# Altium PCB przed poligonami.PcbDoc
Units mm, origin at the board's own origin, x right, y up, seen from the top; angles counter-clockwise.
Board outline 50 x 35 mm, 4 copper layers (Top Layer, Internal1, Internal2, Bottom Layer), stack 1.615 mm thick; 67 components, 59 nets, 267 pads, 77 vias.
Unrouted connection lines stored in the file: 101.
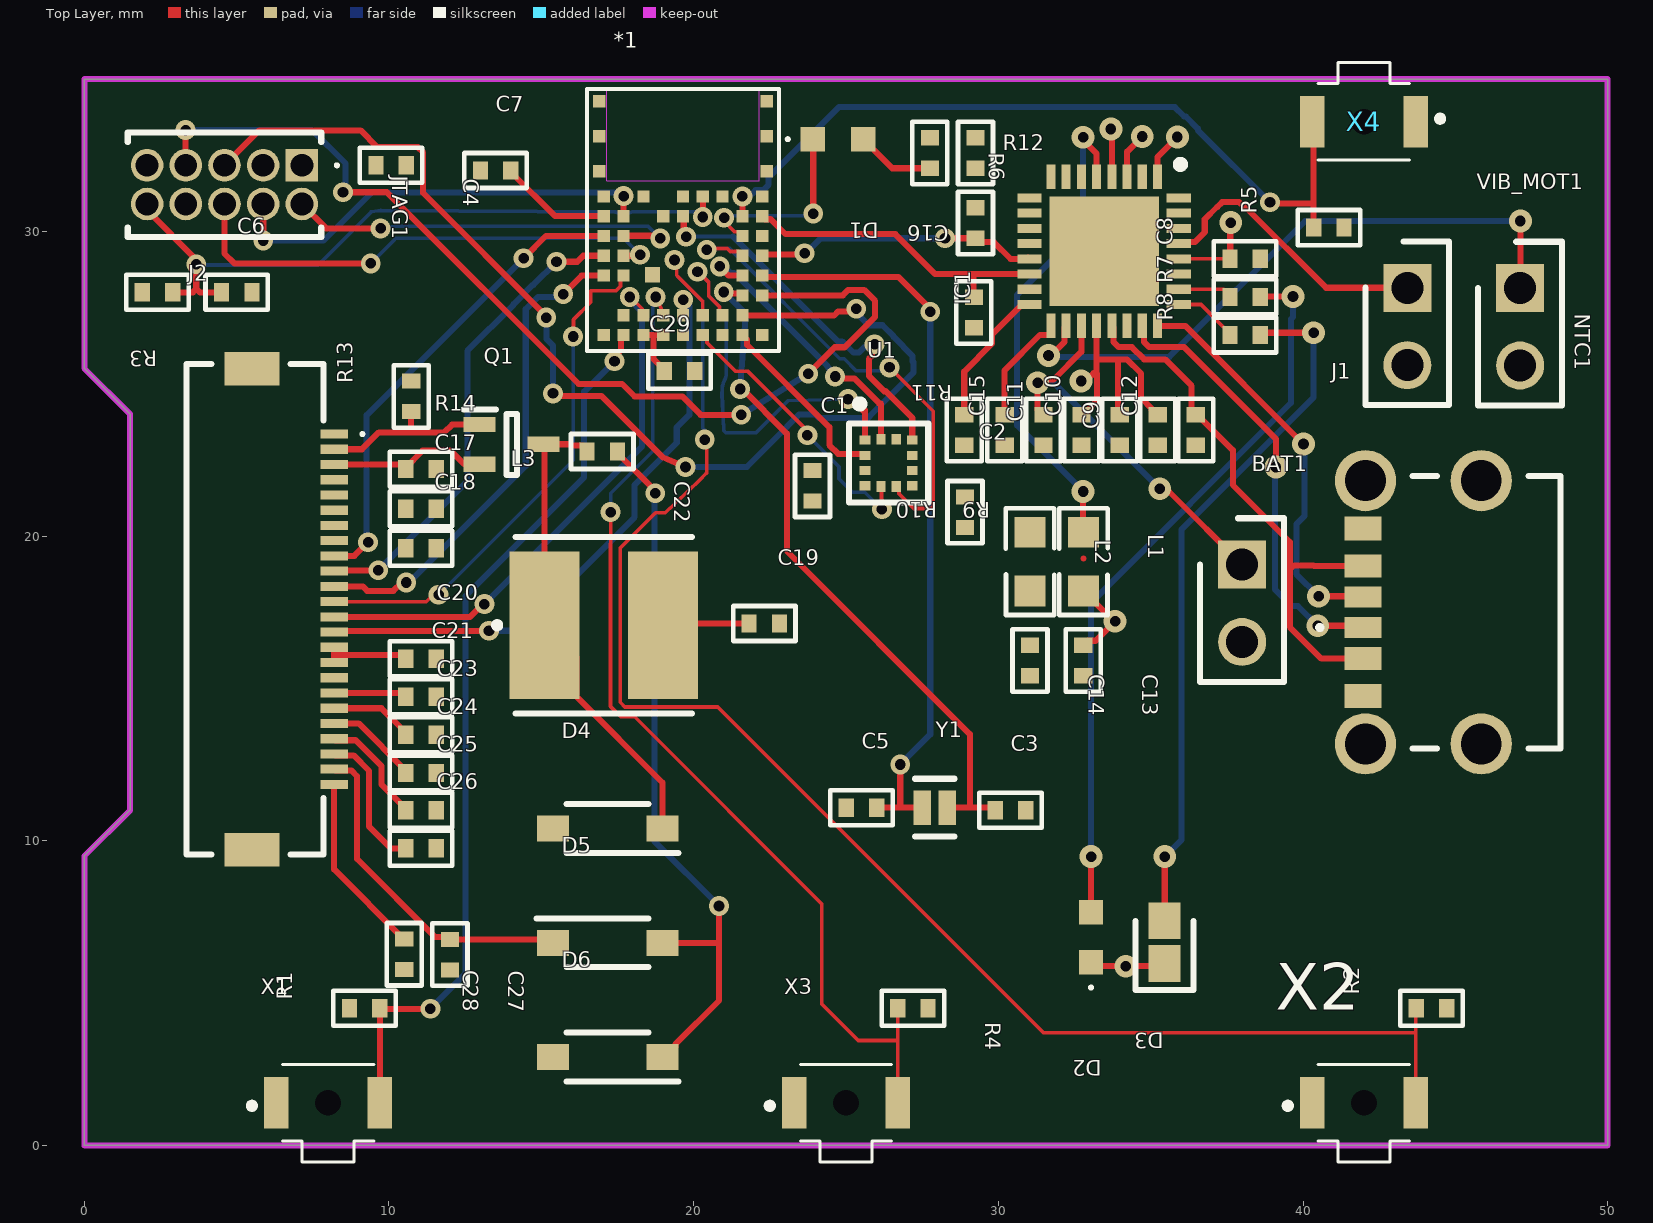
[diagram p0: Top Layer view]
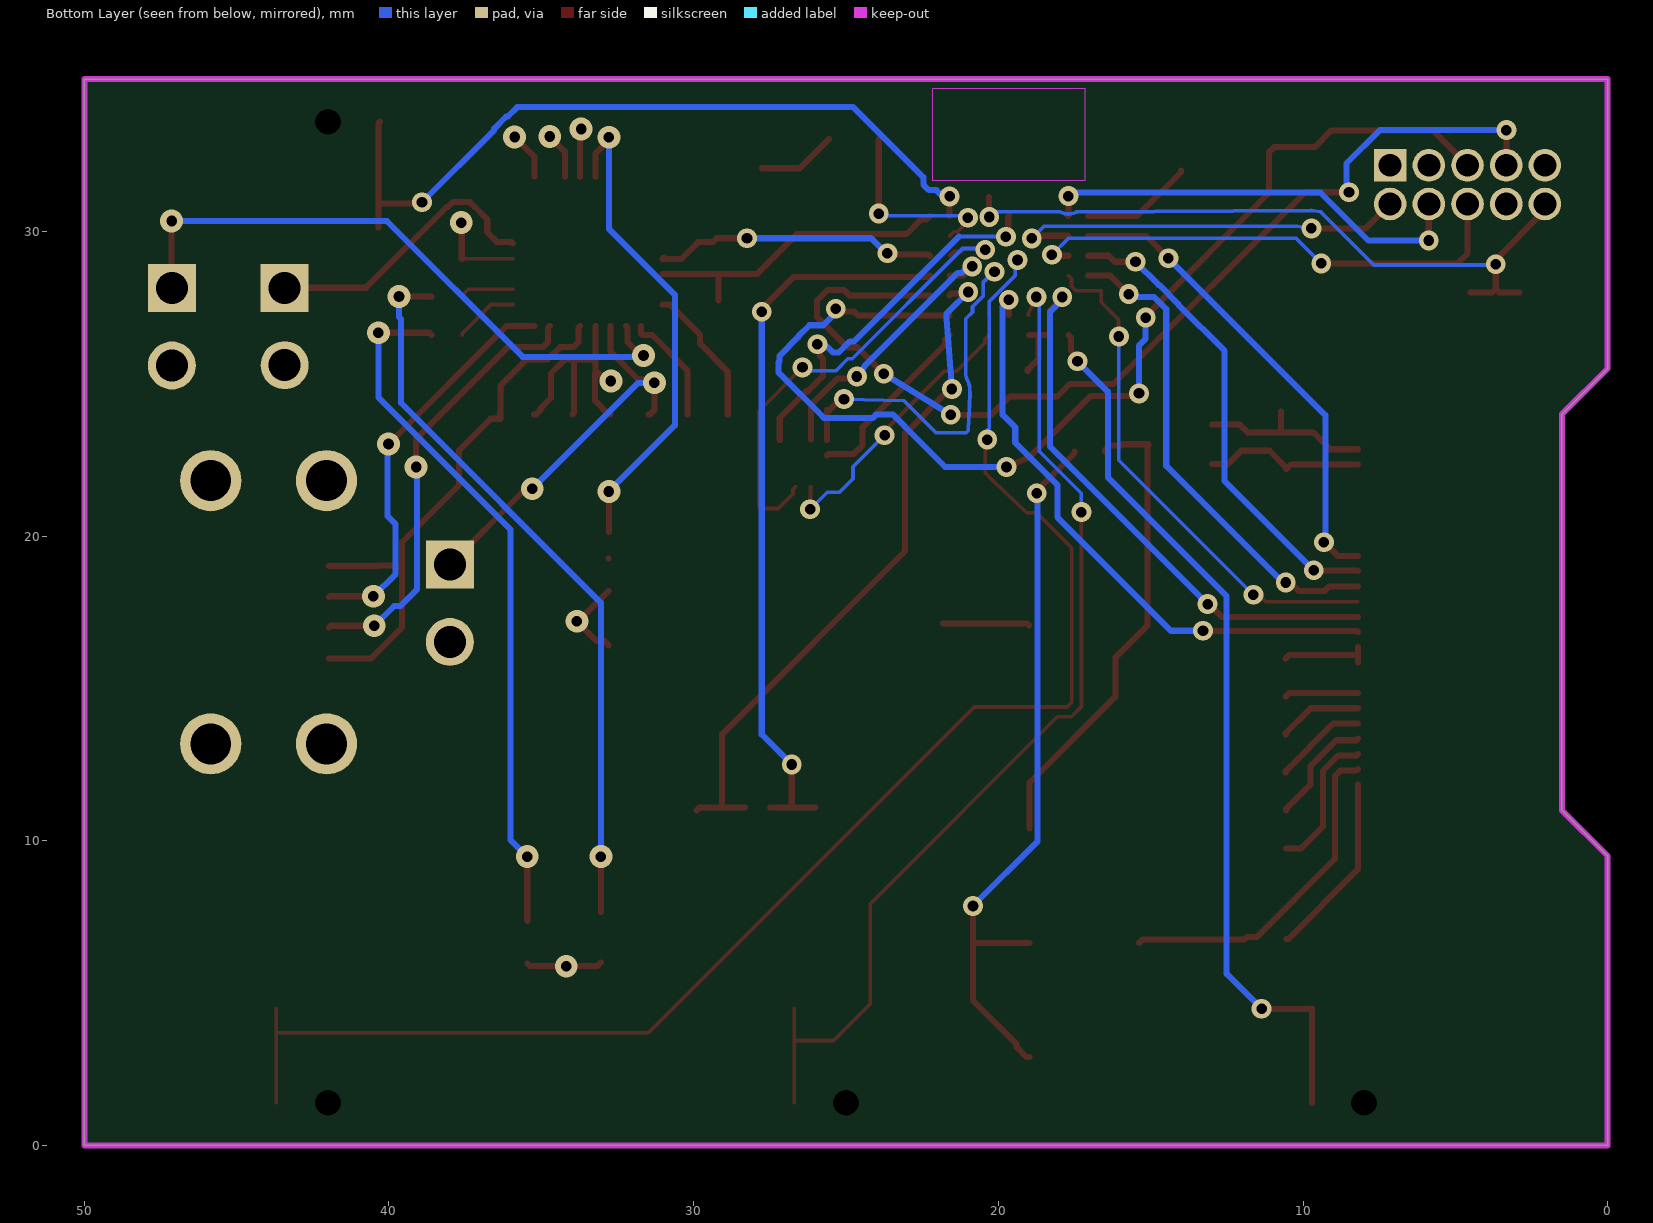
[diagram p1: Bottom Layer view, seen from below]
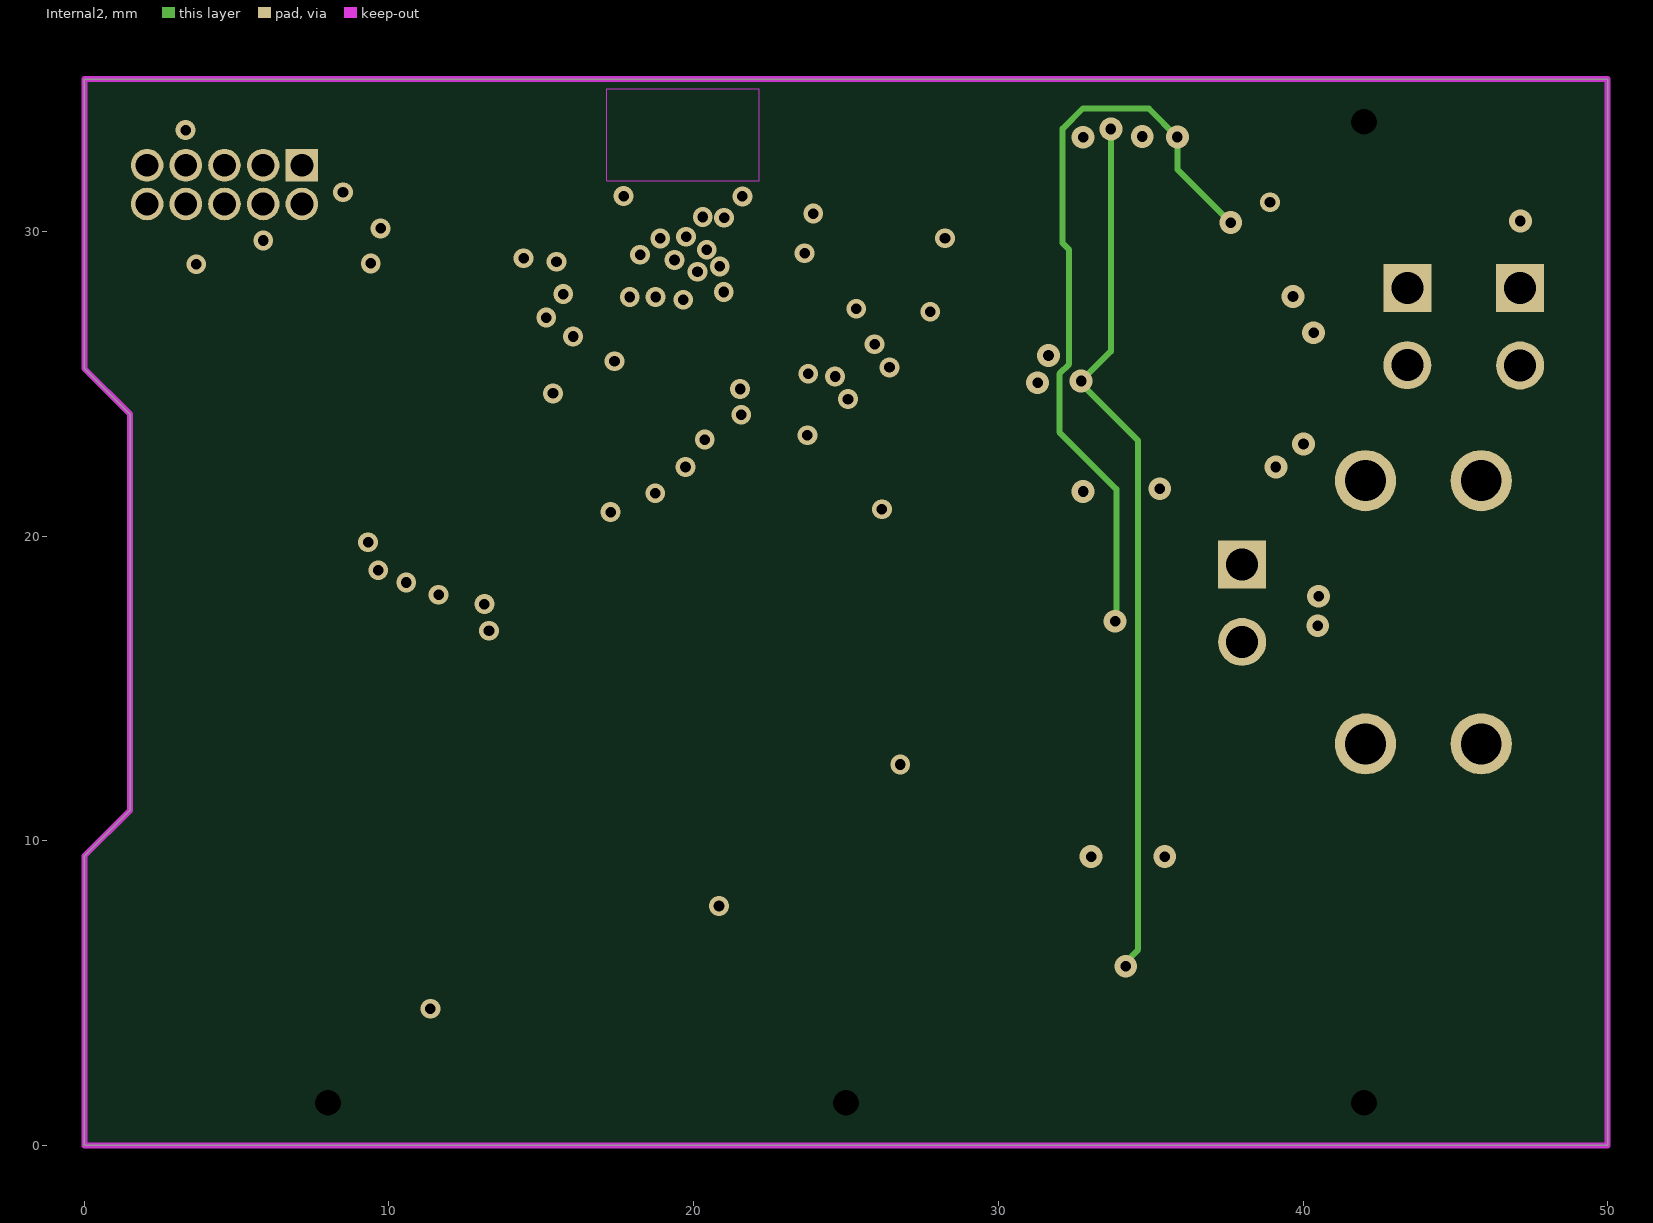
[diagram p2: Internal2]
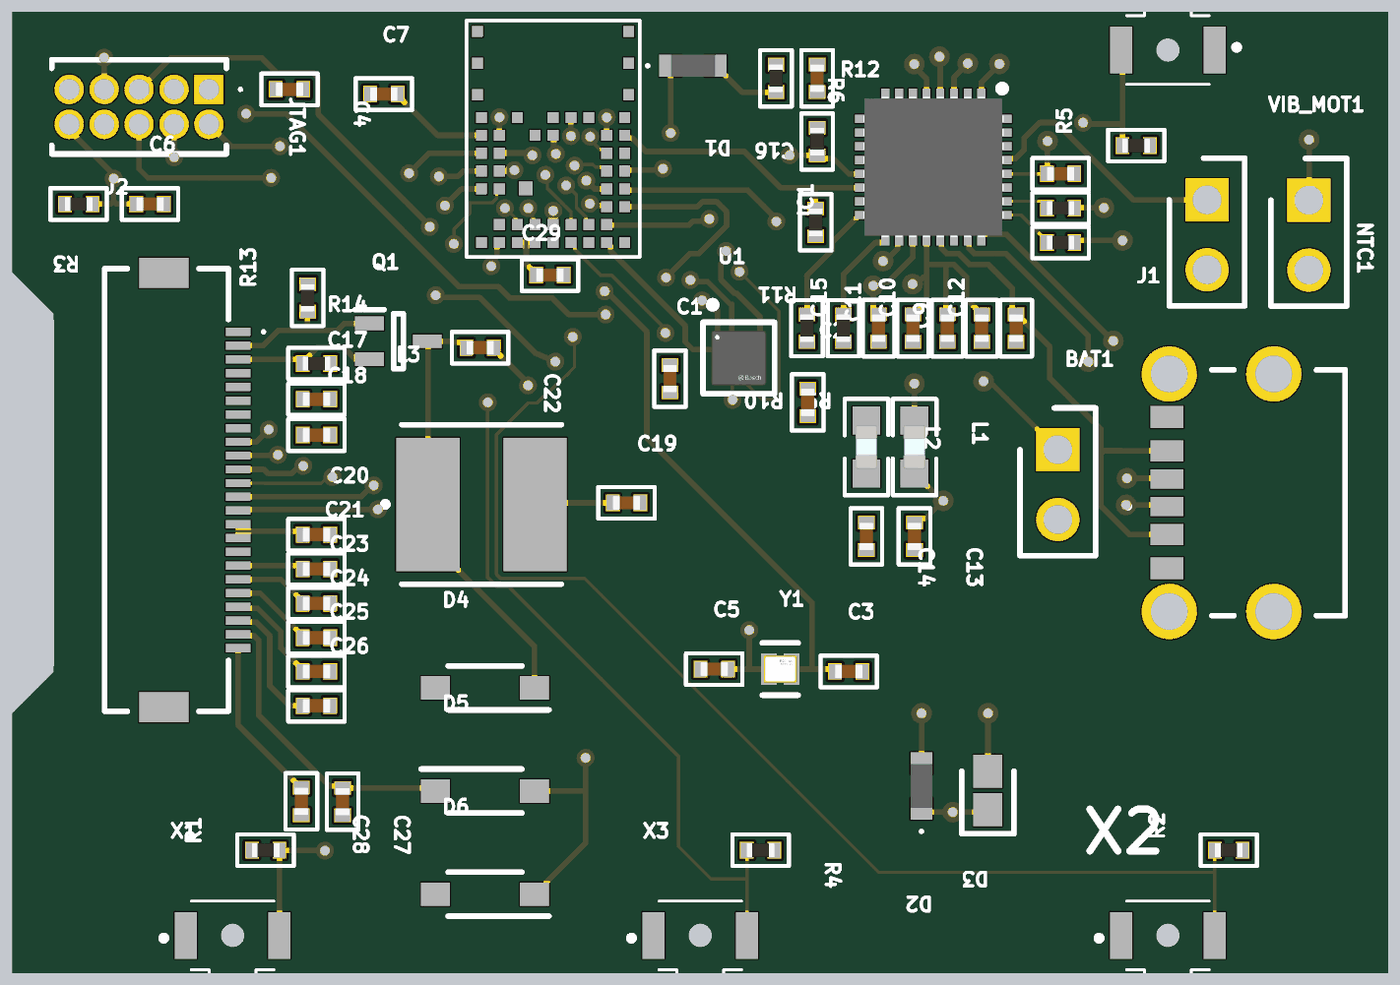
[diagram p3: 3D render of the assembled board from above, using the file's embedded part models]

## Layer stack, top to bottom
Top Solder: solder mask 0.0102, Solder Resist, Dk 3.5
Top Layer: signal copper 0.0175
Prepeg_Top1: prepreg 0.2, Dk 4.5
Prepeg_Top2: prepreg 0.2, Dk 4.5
Internal1: signal copper 0.035
Core Dielectric: core 0.71, FR4, Dk 4.8
Internal2: signal copper 0.035
Prepeg_Bottom1: prepreg 0.2, Dk 4.5
Prepeg_Bottom2: prepreg 0.2, Dk 4.5
Bottom Layer: signal copper 0.0175
Bottom Solder: solder mask 0.0102, Solder Resist, Dk 3.5

## Board outline
0,9.5 1.5,11 1.5,24 0,25.5 0,35 50,35 50,0 0.002,0 0.001,-0.001 0,0

## Design rules (kind name [scope] priority, off if disabled: settings)
BoardOutlineClearance [All] p1: gap=0.3 ignorepadtopadclearanceinfootprint=FALSE
Clearance Default [All] p1: gap=0.2 ignorepadtopadclearanceinfootprint=FALSE
Clearance [All] p2: gap=0.12 ignorepadtopadclearanceinfootprint=FALSE except(0: Arc-Hole Track-Hole SMDPad-Hole THPad-Hole Via-Hole Fill-Hole Poly-Hole Region-Hole Text-Hole; 0.25: Track-Via Track-Fill Track-Poly Track-Region Track-Text)
HoleSize [All] p1: absolutevalues=TRUE maxlimit=6 minlimit=0.3 maxpercent=80.000 minpercent=20.000
HoleToHoleClearance [All] p1: gap=0.52 allowstackedmicrovias=TRUE
MinimumAnnularRing [All] p1: minimumring=0.15
MinimumSolderMaskSliver [All] p1: minsoldermaskwidth=0.1
PlaneClearance [All] p1: clearance=0.25
PlaneConnect [All] p1: planeconnectstyle=Relief reliefexpansion=0.2 reliefentries=4 reliefconductorwidth=0.25 reliefairgap=0.2
PolygonConnect PowerCircuits [InNet('No Net')] p1: connectstyle=Relief reliefconductorwidth=0.4 reliefentries=4 polygonreliefangle="90 Angle" airgapwidth=0.254
PolygonConnect [All] p2: thpad.connectstyle=Relief thpad.reliefconductorwidth=0.2 thpad.reliefentries=4 thpad.polygonreliefangle="90 Angle" thpad.airgapwidth=0.2 smdpad.connectstyle=Relief smdpad.reliefconductorwidth=0.2 smdpad.reliefentries=4 smdpad.polygonreliefangle="90 Angle" smdpad.airgapwidth=0.2 via.connectstyle=Direct via.reliefconductorwidth=0.2 via.reliefentries=4 via.polygonreliefangle="45 Angle" via.airgapwidth=0.2
RoutingVias [All] p1: holewidth=0.35 width=0.75 viastyle="Through Hole" minholewidth=0.3 minwidth=0.7 maxholewidth=0.5 maxwidth=0.9
SilkToSilkClearance [All] p1: silktosilkclearance=0.12
SilkToSolderMaskClearance [IsPad] p1: minsilkscreentomaskgap=0.06 clearancetoexposedcopper=TRUE
SolderMaskExpansion [All] p1: expansion=0.05 istentingtop=FALSE
UnRoutedNet [All] p1: checkbadconnections=TRUE
Width [All] p1: maxlimit=1.5 minlimit=0.12 preferedwidth=0.2 midlayer1_prefwidth=0.15 midlayer2_prefwidth=0.15 minimp=50.000000 maximp=50.000000 favimp=50.000000
22 further rules are at their usual default settings.

## Classes and differential pairs
component class zasilanie: BAT1 C8 C9 C10 C11 C12 C13 C14 C15 C16 D2 D3 IC1 J1 L1 L2 NTC1 R7 R8 R9 R10 R11 R12 VIB_MOT1
component class BL653: *1 C3 C4 C5 C6 C7 C29 D1 JTAG1 R1 R2 R3 R4 R5 R6 X1 X2 X3 X4 Y1
component class accelerometer: C1 C2 U1
component class 1.54inch_e-Paper: C17 C18 C19 C20 C21 C22 C23 C24 C25 C26 C27 C28 D4 D5 D6 J2 L3 L? Q1 R13 R14

## Components (designator, comment, footprint, x,y, rotation, side; value= is the part's Value field where it differs from the comment)
*1 "BL653u" BL635U 19.65,29.168 r90 top
BAT1 "Battery" RHDR20W60P0X254_1X20_5130X250X888P 37.873,19.065 r270 top
C1 "100n" 0402_CAP_REFLOW 23.9,21.65 r270 top
C2 "100n" 0402_CAP_REFLOW 28.907,20.785 r270 top
C3 "18p" 0402_CAP_REFLOW 30.4,11 r180 top
C4 "100nF" 0402_CAP_REFLOW 10.07,32.17 r0 top
C5 "18p" 0402_CAP_REFLOW 25.509,11.085 r0 top
C6 "100uF" 0402_CAP_REFLOW 5,28 r0 top
C7 "100nF" 0402_CAP_REFLOW 13.5,32 r180 top
C8 "10u" 0402_CAP_REFLOW 38.1,29.1 r180 top
C9 "10u" 0402_CAP_REFLOW 35.232,23.485 r270 top
C10 "10u" 0402_CAP_REFLOW 33.982,23.485 r270 top
C11 "10u" 0402_CAP_REFLOW 32.732,23.485 r270 top
C12 "1u" 0402_CAP_REFLOW 36.482,23.485 r270 top
C13 "10u" 0402_CAP_REFLOW 32.789,15.913 r270 top
C14 "10u" 0402_CAP_REFLOW 31.039,15.913 r270 top
C15 "2.2u" 0402_CAP_REFLOW 31.482,23.485 r270 top
C16 "100n" 0402_CAP_REFLOW 29.25,32.575 r90 top
C17 "1uF/ 50 V" 0402_CAP_REFLOW 11.05,20.9 r0 top
C18 "1uF/ 50 V" 0402_CAP_REFLOW 11.05,19.6 r0 top
C19 "4.7uF/50V" 0402_CAP_REFLOW 22.319,17.132 r0 top
C20 "1uF/25V" 0402_CAP_REFLOW 11.05,15.975 r0 top
C21 "1uF/ 50 V" 0402_CAP_REFLOW 11.05,14.725 r0 top
C22 "4.7uF/50V" 0402_CAP_REFLOW 17,22.775 r0 top
C23 "1uF/ 50 V" 0402_CAP_REFLOW 11.05,13.475 r180 top
C24 "1uF/ 50 V" 0402_CAP_REFLOW 11.05,12.225 r0 top
C25 "1uF/ 50 V" 0402_CAP_REFLOW 11.05,11 r0 top
C26 "1uF/ 50 V" 0402_CAP_REFLOW 11.05,9.75 r0 top
C27 "1uF/ 50 V" 0402_CAP_REFLOW 12,6.262 r270 top
C28 "1uF/ 50 V" 0402_CAP_REFLOW 10.5,6.275 r270 top
C29 "100nF" 0402_CAP_REFLOW 19.536,25.415 r0 top
D1 "=Value" LED_G 24.739,33.027 r0 top
D2 "=Value" LED_G 33.042,6.832 r90 top
D3 "=Value" LED_B 35.455,6.671 r90 top
D4 "Diode MBR0530" SOD3716X135N 17.175,10.4 r180 top
D5 "Diode MBR0530" SOD3716X135N 17.175,6.65 r0 top
D6 "Diode MBR0530" SOD3716X135N 17.175,2.9 r180 top
IC1 "NPM1300-QEAA-R" nPM1300-QFN50P500X500X90-33N 33.475,29.35 r270 top
J1 "USB-C" USB-C 45,17.5 r90 top
J2 "F34G-1A7Q1-E8C24" F34G1A7Q1E8C24 5.775,17.6 r270 top
JTAG1 "20021111-00010T1LF" 2002111100010T1LF 7.14,32.17 r180 top
L1 "2.2u" 0603_IND_2.2u_30%_DCR<400m? 32.789,19.163 r270 top
L2 "2.2u" 0603_IND_2.2u_30%_DCR<400m? 31.039,19.163 r270 top
L3 "68uH" SRR5828A2R6Y 17.05,17.075 r90 top
NTC1 "Header 2" RHDR20W60P0X254_1X20_5130X250X888P 46.998,28.14 r270 top
Q1 "Si1308EDL-T1-GE3" SOT65P210X110-3N 14.028,23.011 r0 top
R1 "10K" 0402_RES_REFLOW 9.2,4.5 r180 top
R2 "10K" 0402_RES_REFLOW 44.217,4.5 r0 top
R3 "47K" 0402_RES_REFLOW 2.4,28 r0 top
R4 "10K" 0402_RES_REFLOW 27.196,4.5 r0 top
R5 "10K" 0402_RES_REFLOW 40.849,30.128 r0 top
R6 "1.69k" 0402_RES_REFLOW 27.754,32.572 r270 top
R7 "1.69k" 0402_RES_REFLOW 38.1,27.85 r180 top
R8 "1.69k" 0402_RES_REFLOW 38.1,26.6 r180 top
R9 "300k" 0402_RES_REFLOW 30.207,23.485 r90 top
R10 "300k" 0402_RES_REFLOW 28.882,23.485 r90 top
R11 "10K" 0402_RES_REFLOW 29.198,27.337 r270 top
R12 "10K" 0402_RES_REFLOW 29.25,30.275 r90 top
R13 "10K" 0402_RES_REFLOW 10.726,24.587 r270 top
R14 "3" 0402_RES_REFLOW 11.05,22.2 r0 top
U1 "BMA456" FP-BMA456-MFG 26.4,22.4 r270 top
VIB_MOT1 "vibration_motor_ODS-13807" RHDR20W60P0X254_1X20_5130X250X888P 43.298,28.15 r270 top
X1 "B3U-3000PM-B" B3U3000PMB 8,1.4 r180 top
X2 "B3U-3000PM-B" B3U3000PMB 42,1.4 r180 top
X3 "B3U-3000PM-B" B3U3000PMB 25,1.4 r180 top
X4 "B3U-3000PM-B" B3U3000PMB 42,33.6 r0 top
Y1 "ECS-.327-12.5-1210-TR" FP-ECX-1210-MFG 27.909,11.085 r0 top

## Footprints (in the part's own frame and the unit in brackets; to place one, negate y for a bottom-side part, rotate by r counter-clockwise, add the part's x,y. Pads: shape width x height; smd on the part's side, far side on the other; paste and mask are expansions set on the pad)
0402_CAP_REFLOW [mm]
  rect 0.5x0.6 smd paste-0.03 mask+0.1: 1(0.5,0) 2(-0.5,0)
  silkscreen extent -1.02,-0.57 1.02,0.57, body extent -0.5,-0.25 0.5,0.25, height 0.5
0402_RES_REFLOW [mm]
  rect 0.5x0.6 smd paste-0.03 mask+0.1: 1(0.5,0) 2(-0.5,0)
  silkscreen extent -1.02,-0.57 1.02,0.57, body extent -0.5,-0.25 0.5,0.25, height 0.3
0603_IND_2.2u_30%_DCR<400m? [mil]
  rect 40x40 smd: 1(-37.89,0) 2(37.89,0)
  silkscreen extent -69,-31 69,31, body extent -31,-16 31,16, height 39
2002111100010T1LF [mm]
  rect 1.07x1.07 hole 0.75: 1(0,0)
  round 1.07 hole 0.75: 2(0,1.27) 3(1.27,0) 4(1.27,1.27) 5(2.54,0) 6(2.54,1.27) 7(3.81,0) 8(3.81,1.27) 9(5.08,0) 10(5.08,1.27)
  silkscreen extent -1.2,-1.08 5.71,2.35
B3U3000PMB [mm]
  rect 0.8x1.7 smd: 1(1.7,0) 2(-1.7,0)
  round 0.425 hole 0.85 unplated: 3(0,0)
  silkscreen extent -1.5,-1.25 2.6,1.95
BL635U [mm]
  rect 0.4x0.4 smd mask+0.051: 1(1.982,2.6) 3(1.982,1.3) 5(1.982,0) 6(1.982,-0.65) 7(1.982,-1.3) 9(1.982,-2.6) 10(1.332,-2.6) 11(0.683,-2.6) 12(0.033,-2.6) 13(-0.617,-2.6) 14(-1.267,-2.6) 16(-2.567,-2.6) 17(-2.567,-1.95) 18(-2.567,-1.3) 19(-2.567,-0.65) 20(-2.567,0) 21(-2.567,0.65) 22(-2.567,1.3) 23(-2.567,1.95) 24(-2.567,2.6) 27(-0.617,2.6) 28(0.033,2.6) 29(0.682,2.6) 30(1.333,2.6) 31(1.332,1.95) 33(1.332,0.65) 34(1.332,0) 37(1.333,-1.95) 38(0.682,-1.95) 39(0.033,-1.95) 40(-0.617,-1.95) 41(-1.267,-1.95) 42(-1.917,-1.95) 43(-1.917,-1.3) 44(-1.917,-0.65) 45(-1.917,0) 46(-1.917,0.65) 47(-1.917,1.3) 48(-1.917,1.95) 50(-0.617,1.95) 51(0.033,1.95) 52(0.683,1.95) G2(5.107,-2.75) G3(3.957,-2.75) G4(2.807,-2.75) G5(2.808,2.75) G6(3.957,2.75) G7(5.107,2.75)
  rect 0.5x0.5 smd mask+0.051: G1(-0.592,1)
  Keep-Out Layer lines w0.025: 2.5,2.5 2.5,-2.5 5.508,-2.5 5.508,2.5 2.5,2.5
  silkscreen extent -3.09,-3.15 5.51,3.15, body extent -2.77,-2.95 5.31,2.95, height 0.01
F34G1A7Q1E8C24 [mm]
  rect 0.3x0.9 smd: 1(-5.75,2.425) 2(-5.25,2.425) 3(-4.75,2.425) 4(-4.25,2.425) 5(-3.75,2.425) 6(-3.25,2.425) 7(-2.75,2.425) 8(-2.25,2.425) 9(-1.75,2.425) 10(-1.25,2.425) 11(-0.75,2.425) 12(-0.25,2.425) 13(0.25,2.425) 14(0.75,2.425) 15(1.25,2.425) 16(1.75,2.425) 17(2.25,2.425) 18(2.75,2.425) 19(3.25,2.425) 20(3.75,2.425) 21(4.25,2.425) 22(4.75,2.425) 23(5.25,2.425) 24(5.75,2.425)
  rect 1.1x1.8 smd: MP1(-7.9,-0.275) MP2(7.9,-0.275)
  silkscreen extent -8.05,-2.42 8.05,3.4
FP-BMA456-MFG [mm]
  rect 0.3x0.35 smd paste+0 mask+0: 1(-0.75,-0.775) 2(-0.25,-0.775) 3(0.25,-0.775) 4(0.75,-0.775) 7(0.75,0.775) 8(0.25,0.775) 9(-0.25,0.775) 10(-0.75,0.775)
  rect 0.35x0.3 smd paste+0 mask+0: 5(0.775,-0.25) 6(0.775,0.25) 11(-0.775,0.25) 12(-0.775,-0.25)
  silkscreen extent -2.06,-1.3 1.3,1.3, body extent -1,-1 1,1, height 0.7
FP-ECX-1210-MFG [mm]
  rect 0.575x1.14 smd paste+0 mask+0: 1(-0.413,0) 2(0.413,0)
  silkscreen extent -0.65,-0.95 0.65,0.95, body extent -0.6,-0.5 0.6,0.5, height 0.5
LED_B [mm] "SML-LX0603USBW-TR"
  rect 1.2x1.05 smd: 1(-0.7,0) 2(0.7,0)
  silkscreen extent -1.58,-0.95 0.7,0.95
LED_G [mm] "SML-LXFM0603SUGCTR"
  rect 0.8x0.8 smd: 1(-0.825,0) 2(0.825,0)
  silkscreen extent -1.7,-0.05 -1.6,0.05, body extent -0.8,-0.4 0.8,0.4, height 1.2
nPM1300-QFN50P500X500X90-33N [mm]
  rect 0.8x0.3 smd: 1(-2.45,1.75) 2(-2.45,1.25) 3(-2.45,0.75) 4(-2.45,0.25) 5(-2.45,-0.25) 6(-2.45,-0.75) 7(-2.45,-1.25) 8(-2.45,-1.75) 17(2.45,-1.75) 18(2.45,-1.25) 19(2.45,-0.75) 20(2.45,-0.25) 21(2.45,0.25) 22(2.45,0.75) 23(2.45,1.25) 24(2.45,1.75)
  rect 0.3x0.8 smd: 9(-1.75,-2.45) 10(-1.25,-2.45) 11(-0.75,-2.45) 12(-0.25,-2.45) 13(0.25,-2.45) 14(0.75,-2.45) 15(1.25,-2.45) 16(1.75,-2.45) 25(1.75,2.45) 26(1.25,2.45) 27(0.75,2.45) 28(0.25,2.45) 29(-0.25,2.45) 30(-0.75,2.45) 31(-1.25,2.45) 32(-1.75,2.45)
  rect 3.6x3.6 smd: 33(0,0)
  silkscreen extent -2.97,2.38 -2.73,2.63, body extent -2.55,-2.55 2.55,2.55, height 0.9
RHDR20W60P0X254_1X20_5130X250X888P [mm]
  rect 1.575x1.575 hole 1.05: 1(0,0.127)
  round 1.575 hole 1.05: 2(2.54,0.127)
  silkscreen extent -1.52,-1.25 3.85,1.5
SOD3716X135N [mm]
  rect 1.05x0.85 smd: 1(-1.8,0) 2(1.8,0)
  silkscreen extent -2.32,-0.8 1.34,0.8
SOT65P210X110-3N [mm]
  rect 1.05x0.5 smd: 1(-1.05,0.65) 2(-1.05,-0.65) 3(1.05,0)
  silkscreen extent -1.58,-1 0.18,1.15
SRR5828A2R6Y [mm]
  rect 4.85x2.3 smd: 1(0,1.95) 2(0,-1.95)
  silkscreen extent -2.9,-2.9 2.9,3.6
USB-C [mm]
  rect 0.7x1.2 smd: A5(-0.5,3.03) B5(0.5,3.03)
  rect 0.76x1.2 smd: A9(1.52,3.03) B9(-1.52,3.03)
  rect 0.8x1.2 smd: A12(2.75,3.03) B12(-2.75,3.03)
  round 2.01 hole 1.34: MH1(-4.32,-0.85) MH2(4.32,-0.85) MH3(-4.32,2.95) MH4(4.32,2.95)
  silkscreen extent -4.47,-3.45 4.47,4.5, body extent -4.47,-3.44 4.47,3.46, height 0.25

## Part data
BAT1: "BATTERY, Li-ion, Li-polymer, or LiFePO4", LatestRevisionDate=17-Jul-2002, LatestRevisionNote="Re-released for DXP Platform.", Publisher="Altium Limited"
C1 C2: library part CAP_100n, "Ceramic capacitor"
C3 C5: library part CAP_18p, "Ceramic capacitor"
C4 C7 C29: library part "Capacitor 100nF"
C6: library part "Capacitor 100uF"
C8 C9 C10 C11 C13 C14: library part Cap_0402_10u, "Ceramic capacitor"
C12: library part Cap_0402_1u, "Ceramic capacitor"
C15: library part Cap_0402_2.2u, "Ceramic capacitor"
C16: library part Cap_0402_100n, "Ceramic capacitor"
C17 C18 C21 C23 C24 C25 C26 C27 C28: library part "Capacitor 1uF/50V", "50 V"
C19 C22: library part "Capacitor 4.7uF/50V", "50V"
C20: library part "Capacitor 1uF/25V", "25V"
D1 D2: library part LED_G
D3: library part LED_B
IC1: "Integrated Circuit", Manufacturer_Name="Nordic Semiconductor", Mouser Part Number=949-NPM1300-QEAA-R, Datasheet Link=https://infocenter.nordicsemi.com/index.jsp?topic=%2Fstruct_pmic%2Fstruct%2Fnpm1300.html, Height=0.9mm, Manufacturer_Part_Number=NPM1300-QEAA-R, Mouser Price/Stock=https://www.mouser.co.uk/ProductDetail/Nordic-Semiconductor/nPM1300-QEAA-R?qs=3pZoU%2F6IRTiFavqFmjPoaw%3D%3D
J1: "Connector", Manufacturer_Name=Molex, Manufacturer_Part_Number=217175-0001, Mouser Part Number=538-217175-0001, Datasheet Link=https://www.molex.com/pdm_docs/sd/2171750001_sd.pdf, Height=3.46mm, Mouser Price/Stock=https://www.mouser.co.uk/ProductDetail/Molex/217175-0001?qs=DRkmTr78QARWJMiqNnldSg%3D%3D
J2: library part "FFC & FPC Connectors"
JTAG1: "Minitek127<sup></sup>,  Board to Board connector, Unshrouded Vertical Header, Through Hole, Double Row, 10 Positions, 1.27mm (0.050in) pitch.", Manufacturer_Name="Amphenol Communications Solutions", Datasheet Link=https://cdn.amphenol-cs.com/media/wysiwyg/files/drawing/20021111.pdf, Geometry.Height=5.75mm, Manufacturer_Part_Number=20021111-00010T1LF
L1 L2: library part L_0603_2.2u_30%_DCR<400mΩ, "Inductor"
L3: library part InductorA_A, "SRR5828A-680M"
NTC1: library part NTC_1%, "NTC, 10 / 47 / 100 k", LatestRevisionDate=17-Jul-2002, LatestRevisionNote="Re-released for DXP Platform.", Publisher="Altium Limited"
Q1: "MOSFET N-Ch 30V 1.5A TrenchFET SC70 Vishay Si1308EDL-T1-GE3 N-channel MOSFET Transistor, 1.5 A, 30 V, 3-Pin SC-70", Manufacturer_Name=Vishay, Mouser Part Number=78-SI1308EDL-T1-GE3, Datasheet Link=https://componentsearchengine.com/Datasheets/1/SI1308EDL-T1-GE3.pdf, Geometry.Height=1.1mm, Manufacturer_Part_Number=Si1308EDL-T1-GE3, Mouser Price/Stock=https://www.mouser.co.uk/ProductDetail/Vishay-Semiconductors/SI1308EDL-T1-GE3?qs=bX1%252BNvsK%2FBramh9tgpOaEw%3D%3D
R1 R2 R4 R5 R11 R12 R13: library part "Resistor R10K"
R3: library part "Resistor R47K"
R6 R7: library part RES_0402_1.69k_1, "Resistor, green LED"
R8: library part RES_0402_1.69k, "Resistor, blue LED"
R9 R10: library part RES_0402_300k_0.05W_1%, "Resistor"
R14: library part "Resistor R3"
U1: library part CMP-191065-000002-1, "ACCEL 2-16G I2C/SPI 12LGA", Ambient Temperature Range High=+85°C, Ambient Temperature Range Low=-40°C, Frequency=1.6kHz, Manufacturer="Bosch Sensortec", Max Supply Voltage=3.6V, Min Supply Voltage=1.2V, Operating Supply Current=150uA, Package=0, Temperature="-40°C to +85°C", Accel Axis="X+Y and Z", Accel Range=2/4/8/16g, Accel Sensitivity=2048-16384LSB/g, Automotive=No, Category=IC, ComponentLink2Description=Datasheet, ComponentLink2URL=https://ae-bst.resource.bosch.com/media/_tech/media/datasheets/BST-BMA456-DS000.pdf, Device Class L1=Sensors, Device Class L2="Motion Sensors", Device Class L3=Accelerometers, Digikey Description="ACCEL 2-16G I2C/SPI 12LGA", Height=0.7mm, Lead Free=Yes, Manufacturer Part Number=BMA456, Mouser Description="BMA456 Series 3.6 V 1.6 kHz Digital Triaxial Acceleration Sensor - LGA-12", Octopart=https://octopart.com/bma456-bosch+sensortec-99488369, RoHS=TRUE, Sensor Output=I2C,SPI, Temperature Range High=+85°C, Temperature Range Low=-40°C
X1 X2 X3 X4: "Tactile Switches Side Actuate w/Boss w/out Ground Term", Manufacturer_Name="Omron Electronics", Mouser Part Number=653-B3U-3000PM-B, Geometry.Height=1.35mm, Manufacturer_Part_Number=B3U-3000PM-B, Mouser Price/Stock=https://www.mouser.co.uk/ProductDetail/Omron-Electronics/B3U-3000PM-B?qs=hnUcNC2tU0qDz9eschRYDA%3D%3D
Y1: library part CMP-40224-000006-1, "CRYSTAL 32.7680KHZ 12.5PF SMD", Frequency=32.768kHz, Load Capacitance=12.5pF, Manufacturer="ECS International", Package=ECX-1210, Temperature="-40°C to +85°C", Temperature Range High=+85°C, Temperature Range Low=-40°C, Tolerance=20ppm, Automotive=No, Category=Crys, ComponentLink2Description=Datasheet, ComponentLink2URL=https://ecsxtal.com/store/pdf/ECX-1210.pdf, Device Class L1="Passive Components", Device Class L2="Crystals / Oscillators", Device Class L3=Crystals, Digikey Description="CRYSTAL 32.7680KHZ 12.5PF SMD", Esr=90kΩ, Height=0.5mm, Lead Free=Yes, Manufacturer Part Number=ECS-.327-12.5-1210-TR, Octopart=https://octopart.com/ecs-.327-12.5-1210-tr-ecs+international-81221340, RoHS=TRUE, Series=ECX-1210

## Via types
v1: diameter 0.65, hole 0.35, Top Layer to Bottom Layer, tented both sides, 56 vias
v2: diameter 0.75, hole 0.35, Top Layer to Bottom Layer, tented both sides, 21 vias

## Nets (pads, with @x,y where several pads share a name; then routed paths per layer and width w, separated by ;. In a path a pad name is that pad's centre, name@x,y a point inside that pad or via, vN(x,y) a via of type N, cw(c..) or ccw(c..) an arc to the next point about the centre after c; other vN are vias at no path point)
B1: *1.23 R1.2 X1.2 | length 29.4
  Top Layer w0.2: X1.2 R1.2@9.7,4.375 ; R1.2 9.717,4.483 v1(11.357,4.483) ; v1(17.404,25.74) 17.404,25.889 17.615,26.1 17.615,26.515 *1.23
  Bottom Layer w0.2: v1(11.357,4.483) 12.505,5.63 12.505,18.025 16.403,21.924 16.403,24.74 v1(17.404,25.74)
B2: *1.44 R2.2 X2.2 | length 52.2
  Top Layer w0.12: v1(19.369,29.062) 19.443,28.987 19.443,28.557 20.3,27.7 *1.44 ; v1(20.367,23.166) 20.429,23.104 20.429,22.078 20.423,22.072 20.4,22.047 20.194,21.831 cw(c19.732,22.267) 20.168,21.805 19.069,20.768 18.75,20.768 17.59,19.608 17.59,14.542 17.742,14.39 20.786,14.39 31.48,3.696 43.7,3.696 ; X2.2 43.7,3.696 ; R2.2 43.7,4.483 43.7,3.696
  Bottom Layer w0.12: v1(19.369,29.062) 19.443,28.987 19.443,28.557 20.3,27.7 20.3,23.538 20.343,23.496 v1(20.367,23.166)
B3: *1.46 R4.2 X3.2 | length 33.8
  Top Layer w0.12: v1(17.275,20.786) 17.275,20.739 17.322,20.691 17.275,20.644 17.275,19.745 17.27,19.74 17.27,14.41 17.61,14.07 18.062,14.07 24.207,7.925 24.207,4.641 25.402,3.446 26.7,3.446 ; v1(18.75,27.85) 19.025,27.275 *1.46 ; R4.2 26.7,4.496 26.7,3.446 ; X3.2 26.7,3.446
  Bottom Layer w0.12: v1(17.275,20.786) 17.275,21.402 18.66,22.787 18.66,27.76 v1(18.75,27.85)
B4: *1.37 R5.2 X4.2 | length 25.6
  Top Layer w0.2: *1.37 v1(21.6,31.15) ; v1(38.917,30.956) 38.961,30.912 40.349,30.912 R5.2 ; X4.2 40.35,33.55 40.35,30.934 40.325,30.909
  Bottom Layer w0.2: v1(21.6,31.15) 21.686,31.236 21.919,31.236 22.038,31.355 22.279,31.355 22.463,31.538 22.463,31.78 24.764,34.081 35.792,34.081 36.101,33.772 36.156,33.772 36.552,33.377 36.552,33.321 v1(38.917,30.956)
CC1: IC1.23 J1.A5 | length 14.5
  Top Layer w0.2: IC1.23 34.775,26.85 34.775,26.376 34.951,26.2 36.099,26.2 39.108,23.191 v2(39.108,22.269) ; v2(40.482,17.057) 41.913,17.057 J1.A5
  Bottom Layer w0.2: v2(39.108,22.269) 39.088,22.249 39.088,18.246 39.63,17.704 39.835,17.704 v2(40.482,17.057)
CC2: IC1.24 J1.B5 | length 13.3
  Top Layer w0.2: IC1.24 36.138,26.9 v2(40.015,23.023) ; v2(40.512,18.026) 41.944,18.026 J1.B5
  Bottom Layer w0.2: v2(40.015,23.023) 40.043,22.996 40.043,20.653 39.783,20.393 39.783,18.755 v2(40.512,18.026)
GND: *1.1 *1.3 *1.5 *1.7 *1.9 *1.11 *1.16 *1.18 *1.20 *1.24 *1.48 *1.G1 *1.G2 *1.G3 *1.G4 *1.G5 *1.G6 *1.G7 BAT1.2 C1.1 C2.2 C3.2 C4.1 C5.2 C6.1 C7.1 C8.2 C9.1 C10.1 C11.1 C12.1 C13.1 C14.1 C15.1 C16.1 C17.1 C18.1 C19.1 C20.1 C21.1 C23.2 C24.1 C25.1 C26.1 C27.1 C28.1 C29.1 D6.2 IC1.2 IC1.6 IC1.33 J1.A12 J1.B12 J1.MH1 J1.MH2 J1.MH3 J1.MH4 J2.8 J2.17 J2.MP1 J2.MP2 JTAG1.3 JTAG1.9 NTC1.2 R1.1 R2.1 R4.1 R5.1 R6.2 R9.2 R10.2 R13.2 R14.1 U1.8 U1.9 VIB_MOT1.2
LED: *1.38 D1.1 | length 6.3
  Top Layer w0.12: v1(21,30.45) 21,30.332 21.342,29.99 21.46,29.99 *1.38
  Top Layer w0.2: D1.1 23.925,33.016 v1(23.925,30.584)
  Bottom Layer w0.12: v1(21,30.45) 21.067,30.517 23.858,30.517 v1(23.925,30.584)
Net*1_17: *1.17 U1.2 | length 6.1
  Top Layer w0.2: *1.17 21.75,26.45 21.75,26.276 24.453,23.573 24.453,22.986 24.739,22.7 25.433,22.7 25.575,22.7 U1.2
Net*1_19: *1.19 U1.5 | length 9.4
  Top Layer w0.12: *1.19 20.44,26.46 20.44,26.342 21.367,25.415 21.766,25.415 23.733,23.448 v1(23.733,23.311) ; U1.5 26.164,21.611 26.164,20.892 v1(26.177,20.878)
  Bottom Layer w0.12: v1(23.733,23.311) 24.772,22.271 24.772,21.883 25.215,21.441 25.614,21.441 v1(26.177,20.878)
Net*1_27: *1.27 J2.11 | length 16.2
  Top Layer w0.2: J2.11 9.139,18.35 9.286,18.203 10.144,18.203 10.418,18.477 v1(10.566,18.477) ; v1(15.72,27.942) 16.328,28.55 *1.27
  Bottom Layer w0.2: v1(10.566,18.477) 10.59,18.5 10.685,18.5 14.489,22.305 14.489,27.451 14.884,27.846 15.624,27.846 v1(15.72,27.942)
Net*1_28: *1.28 J2.10 | length 15.7
  Top Layer w0.2: J2.10 8.214,18.864 9.632,18.864 v1(9.646,18.878) ; v1(15.5,29.005) 16.18,29.005 16.375,29.2 *1.28
  Bottom Layer w0.2: v1(9.646,18.878) 12.573,21.805 12.573,26.078 14.089,27.594 14.089,27.616 14.719,28.246 14.741,28.246 v1(15.5,29.005)
Net*1_29: *1.29 J2.9 | length 15.7
  Top Layer w0.2: J2.9 8.867,19.35 v1(9.315,19.799) ; v1(14.418,29.119) 15.149,29.85 *1.29
  Bottom Layer w0.2: v1(9.315,19.799) 9.268,19.846 9.268,23.969 v1(14.418,29.119)
Net*1_34: *1.34 U1.10 | length 12.4
  Top Layer w0.2: *1.34 19.675,30.475 19.675,29.902 v1(19.751,29.825) ; v1(25.939,26.294) 25.853,26.208 25.853,25.918 25.752,25.817 25.752,25.258 26.255,24.755 26.302,24.755 27.175,23.882 U1.10
  Bottom Layer w0.12: v1@19.758,29.832 21.293,29.832
  Bottom Layer w0.2: v1(19.751,29.825) v1@19.758,29.832 ; 21.293,29.832 24.732,26.393 24.873,26.393 25.246,26.021 25.425,26.021 25.612,26.208 25.853,26.208 v1(25.939,26.294)
Net*1_39: *1.39 U1.6 | length 15.8
  Top Layer w0.12: v1(20.432,29.4) 20.469,29.437 21.1,29.437 21.197,29.34 21.46,29.34 *1.39 ; v1(26.427,25.538) 27.866,24.1 27.866,20.975 27.795,20.904 27.228,20.904 26.74,21.392 26.74,21.535 U1.6
  Bottom Layer w0.12: v1(20.432,29.4) 20.469,29.437 21.178,29.437 24.799,25.817 24.94,25.817 25.327,25.43 26.32,25.43 v1(26.427,25.538)
Net*1_40: *1.40 U1.12 | length 9.2
  Top Layer w0.2: v1(20.857,28.852) 20.857,28.843 21.15,28.55 *1.40 ; v1(24.642,25.238) 24.706,25.174 25.271,25.174 26.09,24.355 26.136,24.355 26.15,24.342 U1.12
  Bottom Layer w0.2: v1(20.857,28.852) 20.979,28.852 21.194,28.637 21.331,28.637 24.384,25.584 v1(24.642,25.238)
Net*1_43: *1.43 U1.1 | length 13.7
  Top Layer w0.12: v1(20.125,28.674) 20.15,28.674 20.5,28.324 20.5,27.874 20.85,27.524 20.85,27.35 *1.43
  Top Layer w0.2: v1(25.066,24.495) 25.187,24.495 25.551,24.132 25.625,24.132 U1.1
  Bottom Layer w0.12: v1(20.125,28.674) 20.15,28.674 20.5,28.324 20.5,27.874 20.85,27.524 20.85,27.35 21.037,27.163 21.072,27.128 21.072,25.431 ccw(c21.704,25.367) 21.072,25.309 21.072,25.303 cw(c20.952,25.303) 21.067,25.272 21.039,25.167 21.002,25.094 ccw(c21.524,24.83) 20.939,24.849 20.937,24.789 ccw(c21.513,24.685) 20.929,24.656 20.985,23.51 20.988,23.464 21.056,23.396 22.05,23.396 23.099,24.445 v1(25.066,24.495)
Net*1_45: *1.45 J2.14 | length 19.9
  Top Layer w0.2: J2.14 8.237,16.887 13.275,16.887 v1(13.281,16.894) ; *1.45 19.655,27.255 v1(19.655,27.756)
  Bottom Layer w0.2: v1(13.281,16.894) 14.337,16.894 18.064,20.621 18.064,21.683 19.444,23.063 19.444,23.567 19.86,23.982 19.86,27.552 v1(19.655,27.756)
Net*1_47: *1.47 J2.13 | length 18.3
  Top Layer w0.12: v1@17.925,27.85 18.314,27.461 18.314,27.286 *1.47
  Top Layer w0.2: J2.13 12.662,17.35 13.079,17.766 v1(13.13,17.766)
  Bottom Layer w0.2: v1(13.13,17.766) 18.3,22.937 18.3,27.366 17.9,27.766 v1(17.9,27.85)
Net*1_50: *1.50 J2.12 | length 17
  Top Layer w0.12: J2.12 9.13,17.85 9.138,17.842 11.225,17.842 11.458,18.075 v1(11.629,18.075) ; v1(16.043,26.55) 16.054,26.561 16.054,27.105 16.625,27.676 16.625,28.05 17.45,28.05 17.6,28.2 17.6,28.45 *1.50
  Bottom Layer w0.12: v1(11.629,18.075) 16.043,22.49 v1(16.043,26.55)
NetBAT1_1: BAT1.1 C15.2 IC1.19 | length 13
  Top Layer w0.2: C15.2 31.439,23.985 31.289,24.135 v2(31.289,25.031) 31.394,25.136 31.811,25.136 32.725,26.05 IC1.19 ; v2(35.3,21.553) 35.406,21.447 35.618,21.447 BAT1.1
  Bottom Layer w0.2: v2(31.289,25.031) 31.299,25.02 31.833,25.02 v2(35.3,21.553)
NetC17_2: C17.2 J2.4
NetC18_2: C18.2 J2.5
NetC21_2: C21.2 J2.18 | length 2.4
  Top Layer w0.2: J2.18 10.452,14.85 C21.2@10.565,14.737
NetC22_1: C22.1 D5.2 D6.1 | length 24
  Top Layer w0.2: C22.1 17.5,22.725 18.739,21.486 v1(18.739,21.403) ; D6.1 19.075,2.9 19.4,3.225 19.4,3.325 20.833,4.758 20.833,6.65 ; D5.2 20.833,6.65 ; v1(20.833,7.858) 20.833,6.65
  Bottom Layer w0.2: v1(18.739,21.403) 18.711,21.375 18.711,9.98 v1(20.833,7.858)
NetC22_2: C22.2 D4.1 L3.1 Q1.3 | length 15.8
  Top Layer w0.12: Q1.3@15.075,23.014 Q1.3 Q1.3@15.1,22.989 ; C22.2 C22.2@16.516,22.759
  Top Layer w0.2: Q1.3@15.075,23.014 15.934,23.014 15.974,22.975 16.35,22.975 16.5,22.825 C22.2 ; Q1.3@15.1,22.989 L3.1 16.15,16.025 16.15,14.737 18.975,11.912 D4.1
NetC23_1: C23.1 J2.19 | length 2.8
  Top Layer w0.2: J2.19 9.752,14.35 10.565,13.537 C23.1@10.565,13.487
NetC24_2: C24.2 J2.20 | length 3.1
  Top Layer w0.2: J2.20 9.002,13.85 10.565,12.287 C24.2@10.565,12.237
NetC25_2: C25.2 D4.2 J2.21 | length 3.7
  Top Layer w0.2: J2.21 8.25,13.3 8.906,13.3 9.75,12.456 9.75,11.85 10.55,11.05 C25.2
NetC26_2: C26.2 J2.22 | length 4.7
  Top Layer w0.2: J2.22 8.25,12.8 8.84,12.8 9.35,12.29 9.35,10.465 10.065,9.75 C26.2
NetC27_2: C27.2 D5.1 J2.23 | length 11
  Top Layer w0.2: J2.23 8.25,12.3 8.774,12.3 8.95,12.124 8.95,9.407 11.517,6.84 11.844,6.84 C27.2@11.922,6.762 ; C27.2 15.263,6.762 D5.1
NetC28_2: C28.2 J2.24 | length 6.1
  Top Layer w0.2: J2.24 8.2,9.058 10.485,6.773 C28.2@10.535,6.773
NetD1_2: D1.2 R6.1 | length 2.6
  Top Layer w0.2: D1.2 26.518,32.072 R6.1
NetD2_2: D2.2 R7.2 | length 24
  Top Layer w0.2: D2.2 33.046,7.661 v2(33.046,9.478) ; R7.2 38.612,27.862 v2(39.672,27.862)
  Bottom Layer w0.2: v2(33.046,9.478) 33.046,17.814 39.606,24.375 39.606,27.121 39.672,27.187 v2(39.672,27.862)
NetD3_2: D3.2 R8.2 | length 23.1
  Top Layer w0.2: D3.2 35.461,7.377 v2(35.461,9.478) ; R8.2 38.675,26.675 v2(40.35,26.675)
  Bottom Layer w0.2: v2(35.461,9.478) 36.006,10.023 36.006,20.208 40.35,24.553 v2(40.35,26.675)
NetIC1_3: IC1.3 L2.1 | length 1.5
  Top Layer w0.2: IC1.3 34.225,32.618 v2(34.725,33.118)
NetIC1_5: IC1.5 L1.1 | length 16.2
  Top Layer w0.2: v2(32.784,33.09) 32.784,32.995 33.225,32.554 IC1.5 ; L1.1@32.784,20.131 v2(32.784,21.466) ; 32.791,19.266 32.796,19.261
  Bottom Layer w0.2: v2(32.784,33.09) 32.784,30.087 30.614,27.917 30.614,23.636 v2(32.784,21.466)
NetIC1_25: IC1.25 R8.1 | length 2.1
  Top Layer w0.12: IC1.25 36.65,27.6 37.6,26.65 R8.1
NetIC1_26: IC1.26 R7.1 | length 1.8
  Top Layer w0.12: IC1.26 37.4,28.1 37.6,27.9 R7.1
NetIC1_29: IC1.29 VIB_MOT1.1 | length 9.5
  Top Layer w0.2: IC1.29 35.975,29.65 36.342,29.65 36.449,29.65 36.774,29.975 36.774,30.399 37.177,30.802 37.184,30.802 37.347,30.964 37.906,30.964 38.068,30.802 38.105,30.802 40.757,28.15 VIB_MOT1.1
NetJ2_2: J2.2 Q1.1 R13.1 | length 5.8
  Top Layer w0.2: J2.2 9.11,22.85 9.665,23.405 10.726,23.405 10.803,23.405 ; 10.726,23.482 10.803,23.405 ; 10.726,23.5 R13.1 ; Q1.1 12.072,23.661 11.817,23.405 10.803,23.405
NetJ2_3: J2.3 Q1.2 R14.2 | length 5.3
  Top Layer w0.2: J2.3 10.4,22.35 R14.2 10.55,22.25 11.1,22.8 12.025,22.8 12.464,22.361 Q1.2
nRESET: *1.6 C6.2 JTAG1.10 R3.1 | length 23.3
  Top Layer w0.2: JTAG1.10 2.06,30.689 3.675,29.074 3.675,28.117 ; R3.1 3.558,28 3.675,28.117 ; C6.2 3.792,28 3.675,28.117 ; v1(20.3,30.475) *1.6@20.3,31.125
  Bottom Layer w0.12: v1(3.675,28.925) 3.7,28.9 7.675,28.9 9.39,30.615 9.425,30.65 9.647,30.68 cw(c9.725,30.1) 9.729,30.685 17.433,30.637 ccw(c17.7,31.158) 17.991,30.65 20.125,30.65 v1(20.3,30.475)
NTC: IC1.18 NTC1.1 | length 21.6
  Top Layer w0.2: v2(31.645,25.925) 31.724,25.925 32.175,26.376 32.175,26.85 IC1.18 ; NTC1.1 47.134,28.149 v2(47.134,30.342)
  Bottom Layer w0.2: v2(31.645,25.925) 31.686,25.884 35.613,25.884 40.071,30.342 v2(47.134,30.342) ; NTC1.1@46.563,28.702 NTC1.1
RX: *1.14 JTAG1.7 | length 33.9
  Top Layer w0.2: v1(3.325,33.325) 3.325,32.175 JTAG1.7 ; v1(8.489,31.286) 9.931,31.286 16.22,24.997 17.648,24.997 18.058,24.587 19.625,24.587 20.232,23.981 v1(21.56,23.981) ; *1.14@22.253,27.903 24.893,27.903 25.075,28.084 25.592,28.084 25.958,27.718 25.958,27.2 25.731,26.972 24.957,26.198 24.631,26.198 v1(23.759,25.325)
  Bottom Layer w0.2: v1@3.328,33.328 7.477,33.328 8.572,32.232 8.572,31.369 v1(8.489,31.286) ; v1(21.56,23.981) v1(23.759,25.325)
SCL: *1.10 IC1.14 R11.2 | length 10.4
  Top Layer w0.2: *1.10 22.35,30.4 22.524,30.4 23.015,29.909 26.616,29.909 27.925,28.6 29.153,28.6 ; R11.2@29.183,27.732 29.183,28.57 29.153,28.6 ; IC1.14 29.153,28.6
SDA: *1.12 IC1.13 R12.2 | length 9.4
  Top Layer w0.2: *1.12 22.288,29.238 23.595,29.238 v1(23.642,29.284) ; v1(28.25,29.775) R12.2 29.375,29.65 29.85,29.65 30.4,29.1 IC1.13 IC1.13@30.975,29.15
  Bottom Layer w0.2: v1(23.642,29.284) 23.685,29.284 24.175,29.775 v1(28.25,29.775)
SWCLK: *1.31 JTAG1.4 | length 14.5
  Top Layer w0.2: JTAG1.4 5.873,30.897 5.873,29.702 v1(5.875,29.7) ; *1.31 *1.31@17.7,30.508 ; v1(17.7,31.158) *1.31@17.7,30.508 ; *1.31@17.775,30.583 *1.31@17.7,30.508
  Bottom Layer w0.2: v1(5.875,29.7) 7.85,29.7 9.425,31.275 17.439,31.275 17.557,31.158 v1(17.7,31.158)
SWDIO: *1.52 JTAG1.2 | length 13.5
  Top Layer w0.2: JTAG1.2 7.94,30.1 v1(9.724,30.1) ; *1.52 17.707,29.857 18.815,29.857 v1(18.901,29.771)
  Bottom Layer w0.12: v1(9.724,30.1) 10.19,30.175 18.496,30.175 18.899,29.771 v1(18.901,29.771)
SWO: *1.51 JTAG1.6 | length 16.5
  Top Layer w0.2: JTAG1.6 4.6,29.275 4.925,28.95 v1(9.399,28.95) ; *1.51 v1@18.275,29.2
  Bottom Layer w0.12: v1@9.4,28.95 10.112,29.662 ccw(c9.724,30.1) 10.162,29.712 10.225,29.775 17.7,29.775 v1(18.243,29.232)
TX: *1.42 JTAG1.5 | length 38.1
  Top Layer w0.2: JTAG1.5 5.745,33.315 9.066,33.315 9.611,32.77 10.944,32.77 11.12,32.594 11.12,31.261 15.164,27.217 v1(15.164,27.171) ; v1(15.384,24.683) 15.47,24.597 16.977,24.597 18.99,22.584 v1(19.732,22.267) ; *1.42 21.609,27.241 24.608,27.241 24.741,27.373 25.247,27.373 v1(25.333,27.459)
  Bottom Layer w0.2: v1(15.164,27.171) 15.164,26.475 15.386,26.253 15.386,24.684 v1(15.384,24.683) ; v1(19.732,22.267) 21.746,22.267 23.058,23.58 23.058,23.59 23.454,23.986 24.013,23.986 24.128,23.87 25.325,23.87 25.73,23.886 25.788,23.944 27.21,25.366 27.21,25.71 27.189,25.73 27.189,25.91 26.564,26.535 26.564,26.553 26.198,26.919 25.752,26.919 25.333,27.337 v1(25.333,27.459)
VBUS: C12.2 IC1.21 J1.A9 J1.B9 | length 18.4
  Top Layer w0.2: IC1.21 33.775,26.85 33.775,26.376 33.951,26.2 34.385,26.2 34.785,25.8 35.475,25.8 36.342,24.933 C12.2@36.342,24.125 ; C12.2@36.349,24.068 36.349,23.852 36.665,23.852 37.699,22.818 37.699,21.677 39.57,19.807 39.57,18.913 ; J1.B9 40.605,15.98 39.57,17.015 39.57,18.913 ; J1.A9 40.356,19.02 40.347,19.03 39.687,19.03 39.57,18.913
Vcc: *1.21 *1.22 *1.30 C1.2 C2.1 C4.2 C7.2 C14.2 C16.2 C19.2 C20.2 C29.2 IC1.12 IC1.32 J2.15 J2.16 JTAG1.1 L2.2 L3.2 R3.2 R11.1 R12.1 U1.3 U1.7 X1.1 X2.1 X3.1 X4.1 | length 11.4
  Top Layer w0.2: J2.16 8.2,16.1 ; J2.15 8.2,16.1 ; C20.2@10.565,15.987 10.452,16.1 8.2,16.1 ; C7.2 14,31.95 15.45,30.5 *1.30 ; *1.22 18.675,26.6 ; L3.2 19.057,17.132 C19.2 ; *1.21 18.675,26.6 ; C29.2 19.036,25.465 18.675,25.826 18.675,26.6
VOUT2: C8.1 C13.2 IC1.1 IC1.28 L1.2 | length 32.4
  Top Layer w0.12: IC1.28 C8.1
  Top Layer w0.2: C13.2 32.939,16.563 33.191,16.563 v2(33.835,17.207) 33.783,17.207 L1.2 ; IC1.1 35.225,32.445 v2(35.877,33.097) ; C8.1 37.613,29.113 37.613,30.276 v2(37.626,30.289)
  Internal2 w0.2: v2(33.835,17.207) 33.874,17.246 33.874,21.538 32.002,23.41 32.002,25.327 32.32,25.645 32.32,29.402 32.109,29.614 32.109,33.37 32.774,34.035 34.939,34.035 v2(35.877,33.097) 35.877,32.039 v2(37.626,30.289)
VSET1: IC1.17 R9.1 | length 3.7
  Top Layer w0.2: R9.1 30.207,25.441 31.366,26.6 31.675,26.6 31.725,26.65 IC1.17
VSET2: IC1.16 R10.1 | length 4.7
  Top Layer w0.2: R10.1 28.882,25.393 28.875,25.4 29.798,26.323 29.798,26.623 30.775,27.6 IC1.16
VSYS: C9.2 C10.2 C11.2 D2.1 D3.1 IC1.4 IC1.20 | length 41.8
  Top Layer w0.2: v2(32.719,25.089) 32.867,25.089 33.128,25.35 33.225,25.35 ; C11.2 32.782,23.985 33.232,24.435 33.232,25.343 33.225,25.35 ; D2.1 33.166,5.883 35.367,5.883 D3.1 ; IC1.20 33.225,25.8 ; v2(33.695,33.36) 33.695,33.355 33.725,33.325 IC1.4 ; C10.2 33.925,24.042 33.925,25.8 ; C9.2 35.182,23.985 35.032,24.135 35.032,24.185 34.682,24.535 34.682,25.337 34.219,25.8 33.925,25.8 ; 33.225,25.35 33.225,25.8 ; 33.225,25.8 33.925,25.8
  Internal2 w0.2: v2(33.695,33.36) 33.695,26.065 32.677,25.047 34.59,23.134 34.59,6.428 34.18,6.018 v2(34.18,5.883)
XL1: *1.41 C3.1 Y1.2 | length 22.7
  Top Layer w0.2: v1(20.986,28.012) 21.042,27.956 21.544,27.956 *1.41 ; v1(21.524,24.83) 21.595,24.83 23.058,23.366 23.058,19.51 29.068,13.5 29.068,11.085 ; Y1.2 29.068,11.085 ; C3.1 29.815,11.085 29.068,11.085
  Bottom Layer w0.2: v1(20.986,28.012) 21.639,27.36 21.697,27.301 21.697,27.143 v1(21.524,24.83)
XL2: *1.13 C5.1 Y1.1 | length 24.2
  Top Layer w0.2: *1.13 22.301,28.499 26.729,28.499 27.766,27.463 v1(27.766,27.363) ; C5.1 26.78,11.085 ; v1(26.78,12.504) 26.78,11.085 ; Y1.1 26.78,11.085
  Bottom Layer w0.2: v1(26.78,12.504) 27.766,13.489 v1(27.766,27.363)
pads on no net: *1.33 IC1.7 IC1.8 IC1.9 IC1.10 IC1.11 IC1.15 IC1.22 IC1.27 IC1.30 IC1.31 J2.1 J2.6 J2.7 JTAG1.8 U1.4 U1.11 X1.3 X2.3 X3.3 X4.3

## Keep-outs
Keep-Out Layer:
  the board outline again, w0.2

## Silkscreen, mask and mechanical layers (free items; w line width, h text height)
wyswietlacz:
  lines w0.2: 6.35,33.5 6.35,1.5 43.97,1.5 43.97,33.5 6.45,33.5

## Text inside footprints (layer, text, board x,y; h text height)
*1: Top Component Outline "Keep out Area" at 17.618,33.104 h0.38